# Altium PCB ICtest.PcbDoc
Units mil, origin at the board's own origin, x right, y up, seen from the top; angles counter-clockwise.
Board outline 1230 x 1155 mil, 2 copper layers (Top Layer, Bottom Layer); 10 components, 4 nets, 84 pads, 0 vias.
Unrouted connection lines stored in the file: 12.
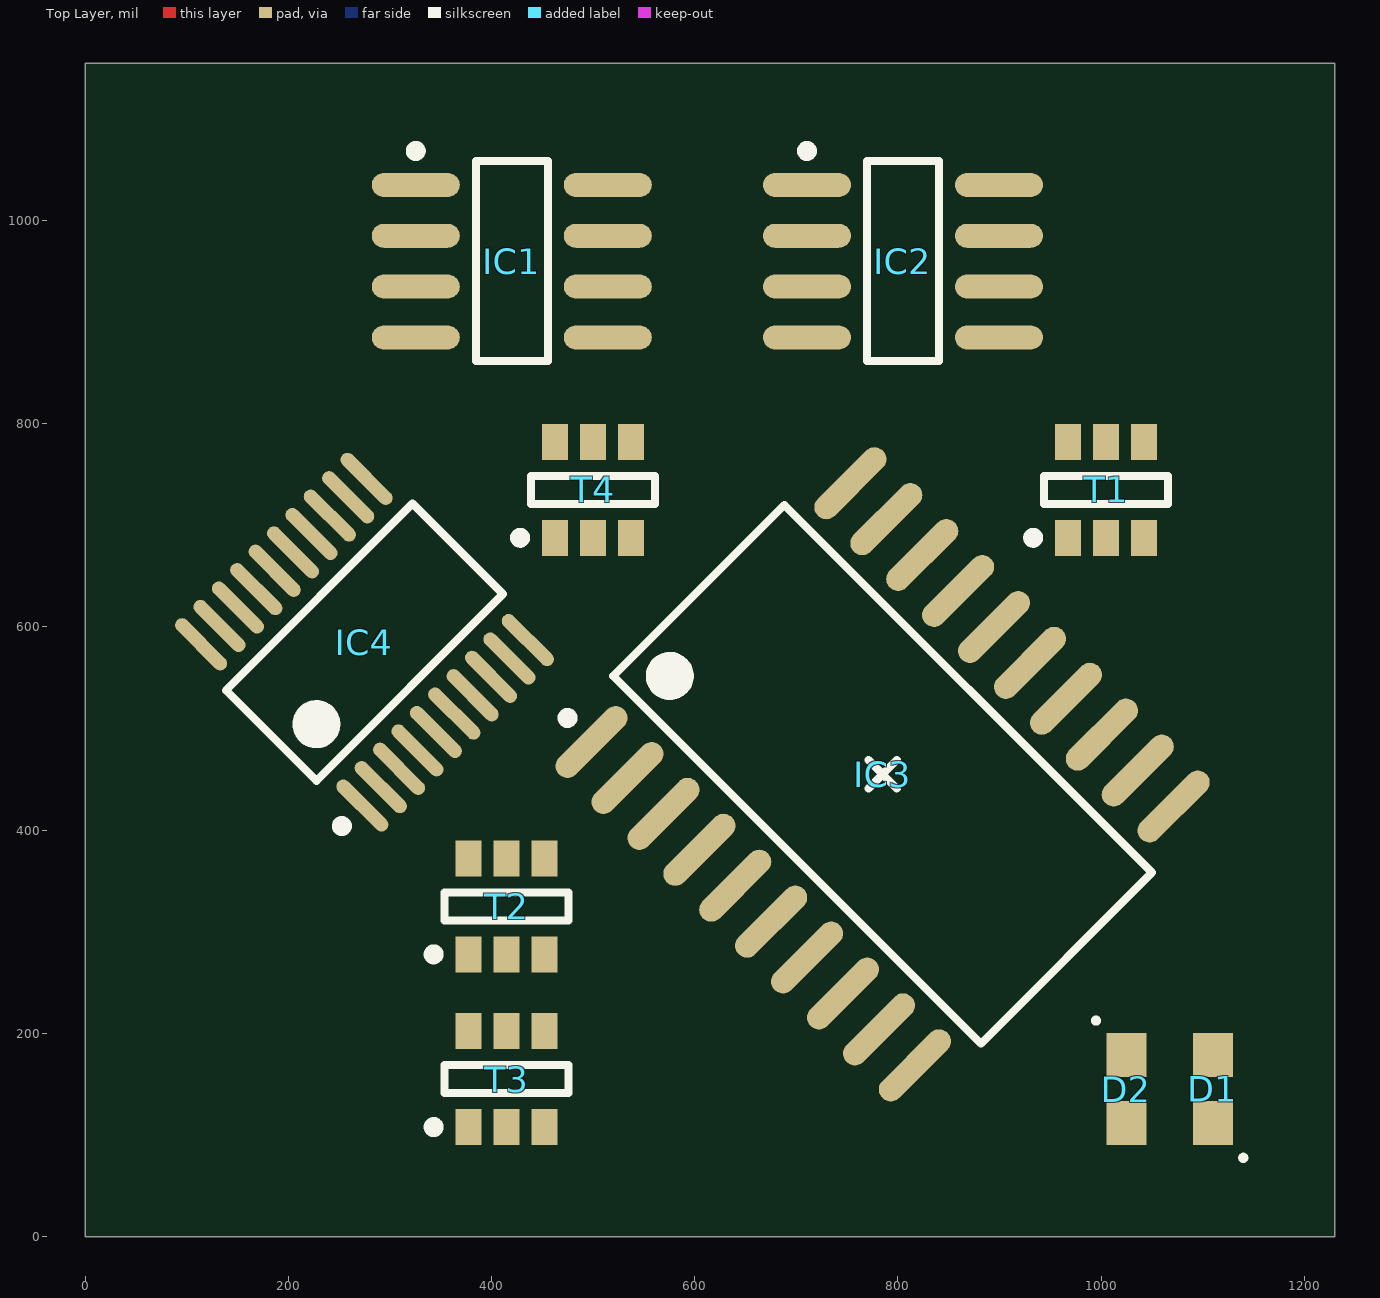
[diagram p0: Top Layer view]
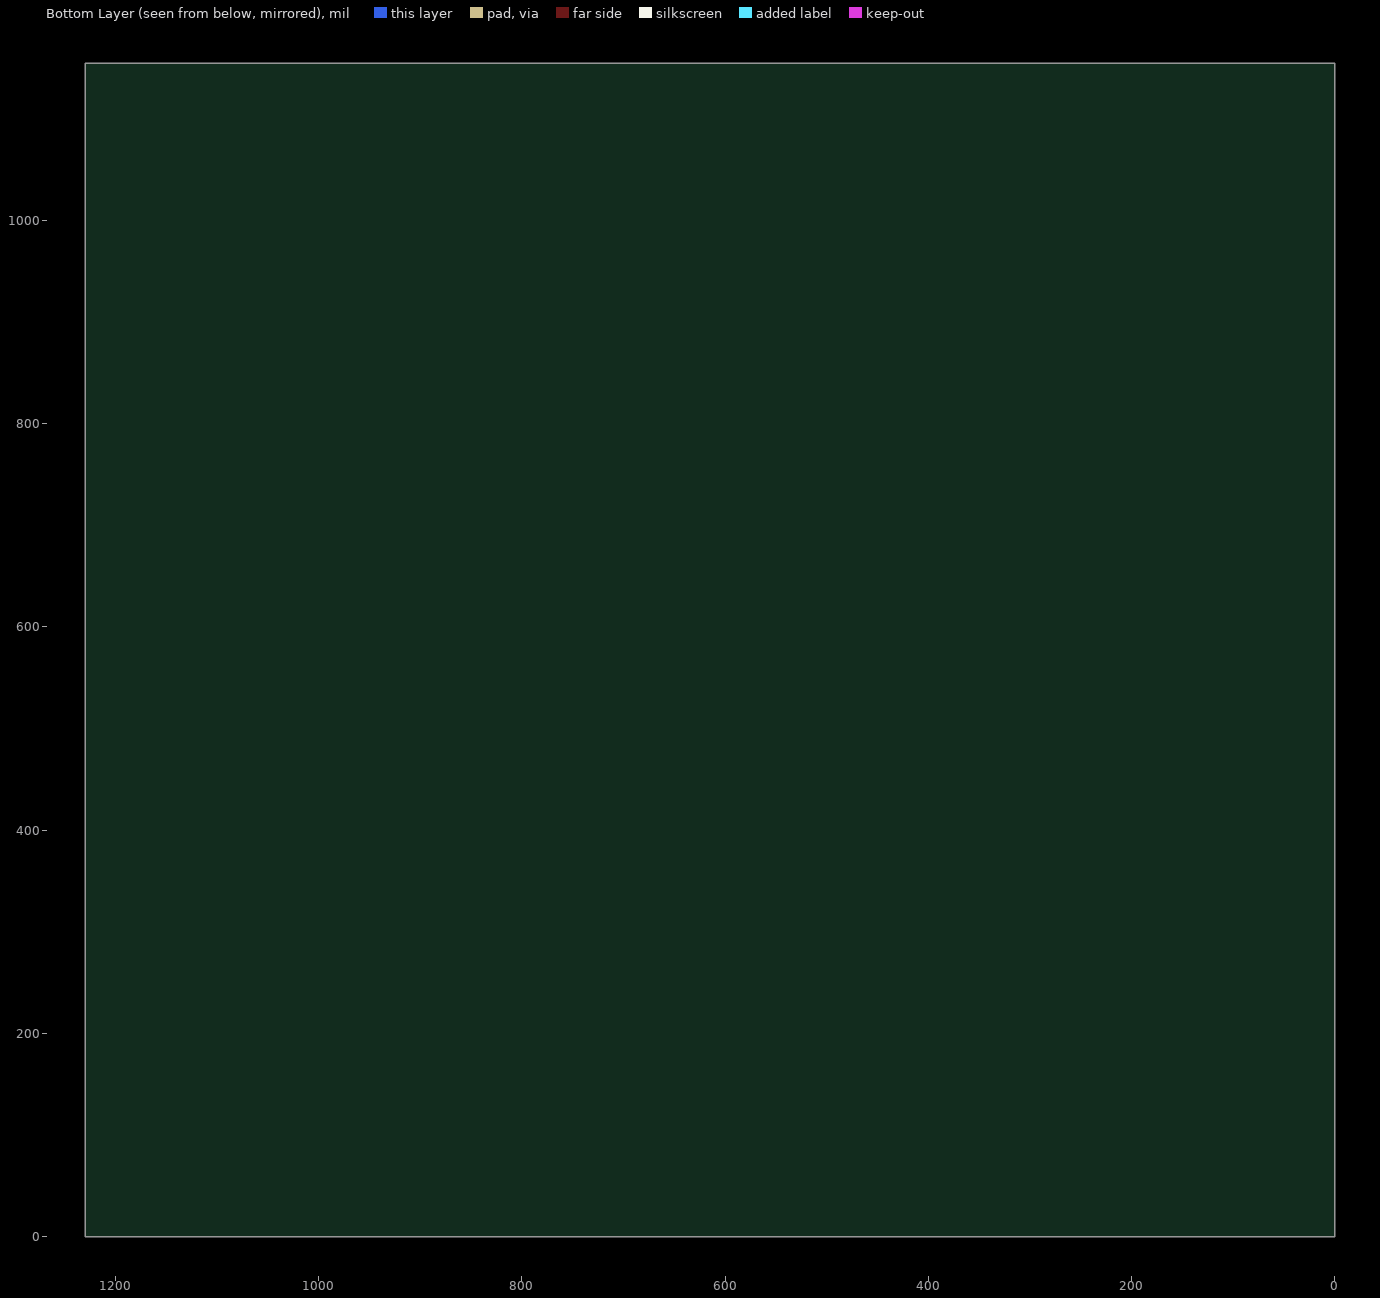
[diagram p1: Bottom Layer view, seen from below]

## Layer stack, top to bottom
Top Solder: solder mask 0.4, Solder Resist, Dk 3.5
Top Layer: signal copper 1.4
Dielectric 1: dielectric 12.6, FR-4, Dk 4.8
Bottom Layer: signal copper 1.4
Bottom Solder: solder mask 0.4, Solder Resist, Dk 3.5

## Board outline
0,0 0,1155 1230,1155 1230,0

## Design rules (kind name [scope] priority, off if disabled: settings)
Clearance [All] p1: gap=10
PolygonConnect [All] p1: connectstyle=Relief reliefconductorwidth=10 reliefentries=4 polygonreliefangle="90 Angle" airgapwidth=10
RoutingVias [All] p1: holewidth=28 width=50 viastyle="Through Hole" minholewidth=28 minwidth=50 maxholewidth=28 maxwidth=50
SolderMaskExpansion [All] p1: expansion=4
Width [All] p1: maxlimit=10 minlimit=10 preferedwidth=10
30 further rules are at their usual default settings.

## Components (designator, comment, footprint, x,y, rotation, side; value= is the part's Value field where it differs from the comment)
D1 "Green" LED-GREEN-0603 1110,145 r270 top
D2 "Green" LED-GREEN-0603 1025,145 r90 top
IC1 "ILD205T" IC-SOIC-8 420,960 r0 top
IC2 "ILD205T" IC-SOIC-8 805,960 r0 top
IC3 "MCP2200-I/SO" IC-SOIC-20 785,455 r45 top
IC4 "PIC24F16KA301T-I/SS" IC-TSSOP-20 275,585 r135 top
T1 "PMN25EN" IC-TSOT-6 1005,735 r90 top
T2 "PMN25EN" IC-TSOT-6 415,325 r90 top
T3 "PMN25EN" IC-TSOT-6 415,155 r90 top
T4 "PMN25EN" IC-TSOT-6 500,735 r90 top

## Footprints (in the part's own frame and the unit in brackets; to place one, negate y for a bottom-side part, rotate by r counter-clockwise, add the part's x,y. Pads: shape width x height; smd on the part's side, far side on the other; paste and mask are expansions set on the pad)
IC-SOIC-8 [mm] "SOIC, 8-Leads, Body 4.9x3.8mm, Pitch 1.27mm, IPC Medium Density"
  oval 2.2x0.6 smd: 1(-2.4,1.905) 2(-2.4,0.635) 3(-2.4,-0.635) 4(-2.4,-1.905) 5(2.4,-1.905) 6(2.4,-0.635) 7(2.4,0.635) 8(2.4,1.905)
  silkscreen extent -2.52,-2.5 0.9,2.88, body extent -3,-2.45 3,2.45, height 1.75
IC-SOIC-20 [mm] "SOIC-20 package, 50 mil pitch"
  oval 2.3x0.6 smd: 1(-4.575,5.715) 2(-4.575,4.445) 3(-4.575,3.175) 4(-4.575,1.905) 5(-4.575,0.635) 6(-4.575,-0.635) 7(-4.575,-1.905) 8(-4.575,-3.175) 9(-4.575,-4.445) 10(-4.575,-5.715) 11(4.575,-5.715) 12(4.575,-4.445) 13(4.575,-3.175) 14(4.575,-1.905) 15(4.575,-0.635) 16(4.575,0.635) 17(4.575,1.905) 18(4.575,3.175) 19(4.575,4.445) 20(4.575,5.715)
  silkscreen extent -4.7,-6.5 3.02,6.69, body extent -5.07,-6.3 5.07,6.3, height 2.24
IC-TSOT-6 [mm] "SOT23, 6-Leads, Body 2.9x1.6mm, Pitch 0.95mm, Lead Span 2.8mm, IPC High Density"
  rect 0.9x0.65 smd: 1(-1.2,0.95) 2(-1.2,0) 3(-1.2,-0.95) 4(1.2,-0.95) 5(1.2,0) 6(1.2,0.95)
  silkscreen extent -1.32,-1.55 0.35,1.95, body extent -1.4,-1.5 1.4,1.5, height 0.86
IC-TSSOP-20 [mm] "TSSOP, 20-Leads, Body 6,50x4,40mm, Pitch 0,65mm"
  oval 1.7x0.35 smd: 1(-2.85,2.925) 2(-2.85,2.275) 3(-2.85,1.625) 4(-2.85,0.975) 5(-2.85,0.325) 6(-2.85,-0.325) 7(-2.85,-0.975) 8(-2.85,-1.625) 9(-2.85,-2.275) 10(-2.85,-2.925) 11(2.85,-2.925) 12(2.85,-2.275) 13(2.85,-1.625) 14(2.85,-0.975) 15(2.85,-0.325) 16(2.85,0.325) 17(2.85,0.975) 18(2.85,1.625) 19(2.85,2.275) 20(2.85,2.925)
  silkscreen extent -2.97,-3.3 1.6,3.77, body extent -3.27,-3.3 3.28,3.3, height 1.2
LED-GREEN-0603 [mm] "SMD LED, Green, 0603"
  rect 1.1x1 smd: 1(-0.85,0) 2(0.85,0)
  silkscreen extent 1.65,0.7 1.78,0.83, body extent -0.81,-0.4 0.81,0.4, height 1.1

## Part data
D1 D2: library part LED0, "Typical INFRARED GaAs LED"
IC1 IC2: "Optocoupler, Phototransistor Output, Dual Channel"
IC3: library part CMP-0186-00205-1, "USB 2.0 to UART Protocol Converter with GPIO, 20-Pin SOIC, Industrial Temperature"
IC4: library part CMP-0046-00392-1, "16-Bit Flash Microcontroller with XLP Technology, 16KB Flash, 2KB SRAM, 20-Pin SSOP, Industrial Temperature, Tape and Reel"
T1 T2 T3 T4: "30V, 6.2A, N-channel Trench MOSFET"

## Nets (pads, with @x,y where several pads share a name; then routed paths per layer and width w, separated by ;. In a path a pad name is that pad's centre, name@x,y a point inside that pad or via, vN(x,y) a via of type N, cw(c..) or ccw(c..) an arc to the next point about the centre after c; other vN are vias at no path point)
NetT1_1: T1.1 T1.2 T1.5 T1.6
NetT2_1: T2.1 T2.2 T2.5 T2.6
NetT3_1: T3.1 T3.2 T3.5 T3.6
NetT4_1: T4.1 T4.2 T4.5 T4.6
pads on no net: D1.1 D1.2 D2.1 D2.2 IC1.1 IC1.2 IC1.3 IC1.4 IC1.5 IC1.6 IC1.7 IC1.8 IC2.1 IC2.2 IC2.3 IC2.4 IC2.5 IC2.6 IC2.7 IC2.8 IC3.1 IC3.2 IC3.3 IC3.4 IC3.5 IC3.6 IC3.7 IC3.8 IC3.9 IC3.10 IC3.11 IC3.12 IC3.13 IC3.14 IC3.15 IC3.16 IC3.17 IC3.18 IC3.19 IC3.20 IC4.1 IC4.2 IC4.3 IC4.4 IC4.5 IC4.6 IC4.7 IC4.8 IC4.9 IC4.10 IC4.11 IC4.12 IC4.13 IC4.14 IC4.15 IC4.16 IC4.17 IC4.18 IC4.19 IC4.20 T1.3 T1.4 T2.3 T2.4 T3.3 T3.4 T4.3 T4.4

## Silkscreen, mask and mechanical layers (free items; w line width, h text height)
BoardOutline:
  the board outline again, w8